# Altium PCB PCB1.PcbDoc (part 3 of 7)
Units mil, origin at the board's own origin, x right, y up, seen from the top; angles counter-clockwise.
Board outline 2100 x 2700 mil, 6 copper layers (Top Layer, Layer 2, Layer 3, Layer 4, Layer 5, Bottom Layer), stack 32.112 mil thick; 200 components, 319 nets, 1280 pads, 807 vias.
Unrouted connection lines stored in the file: 4.
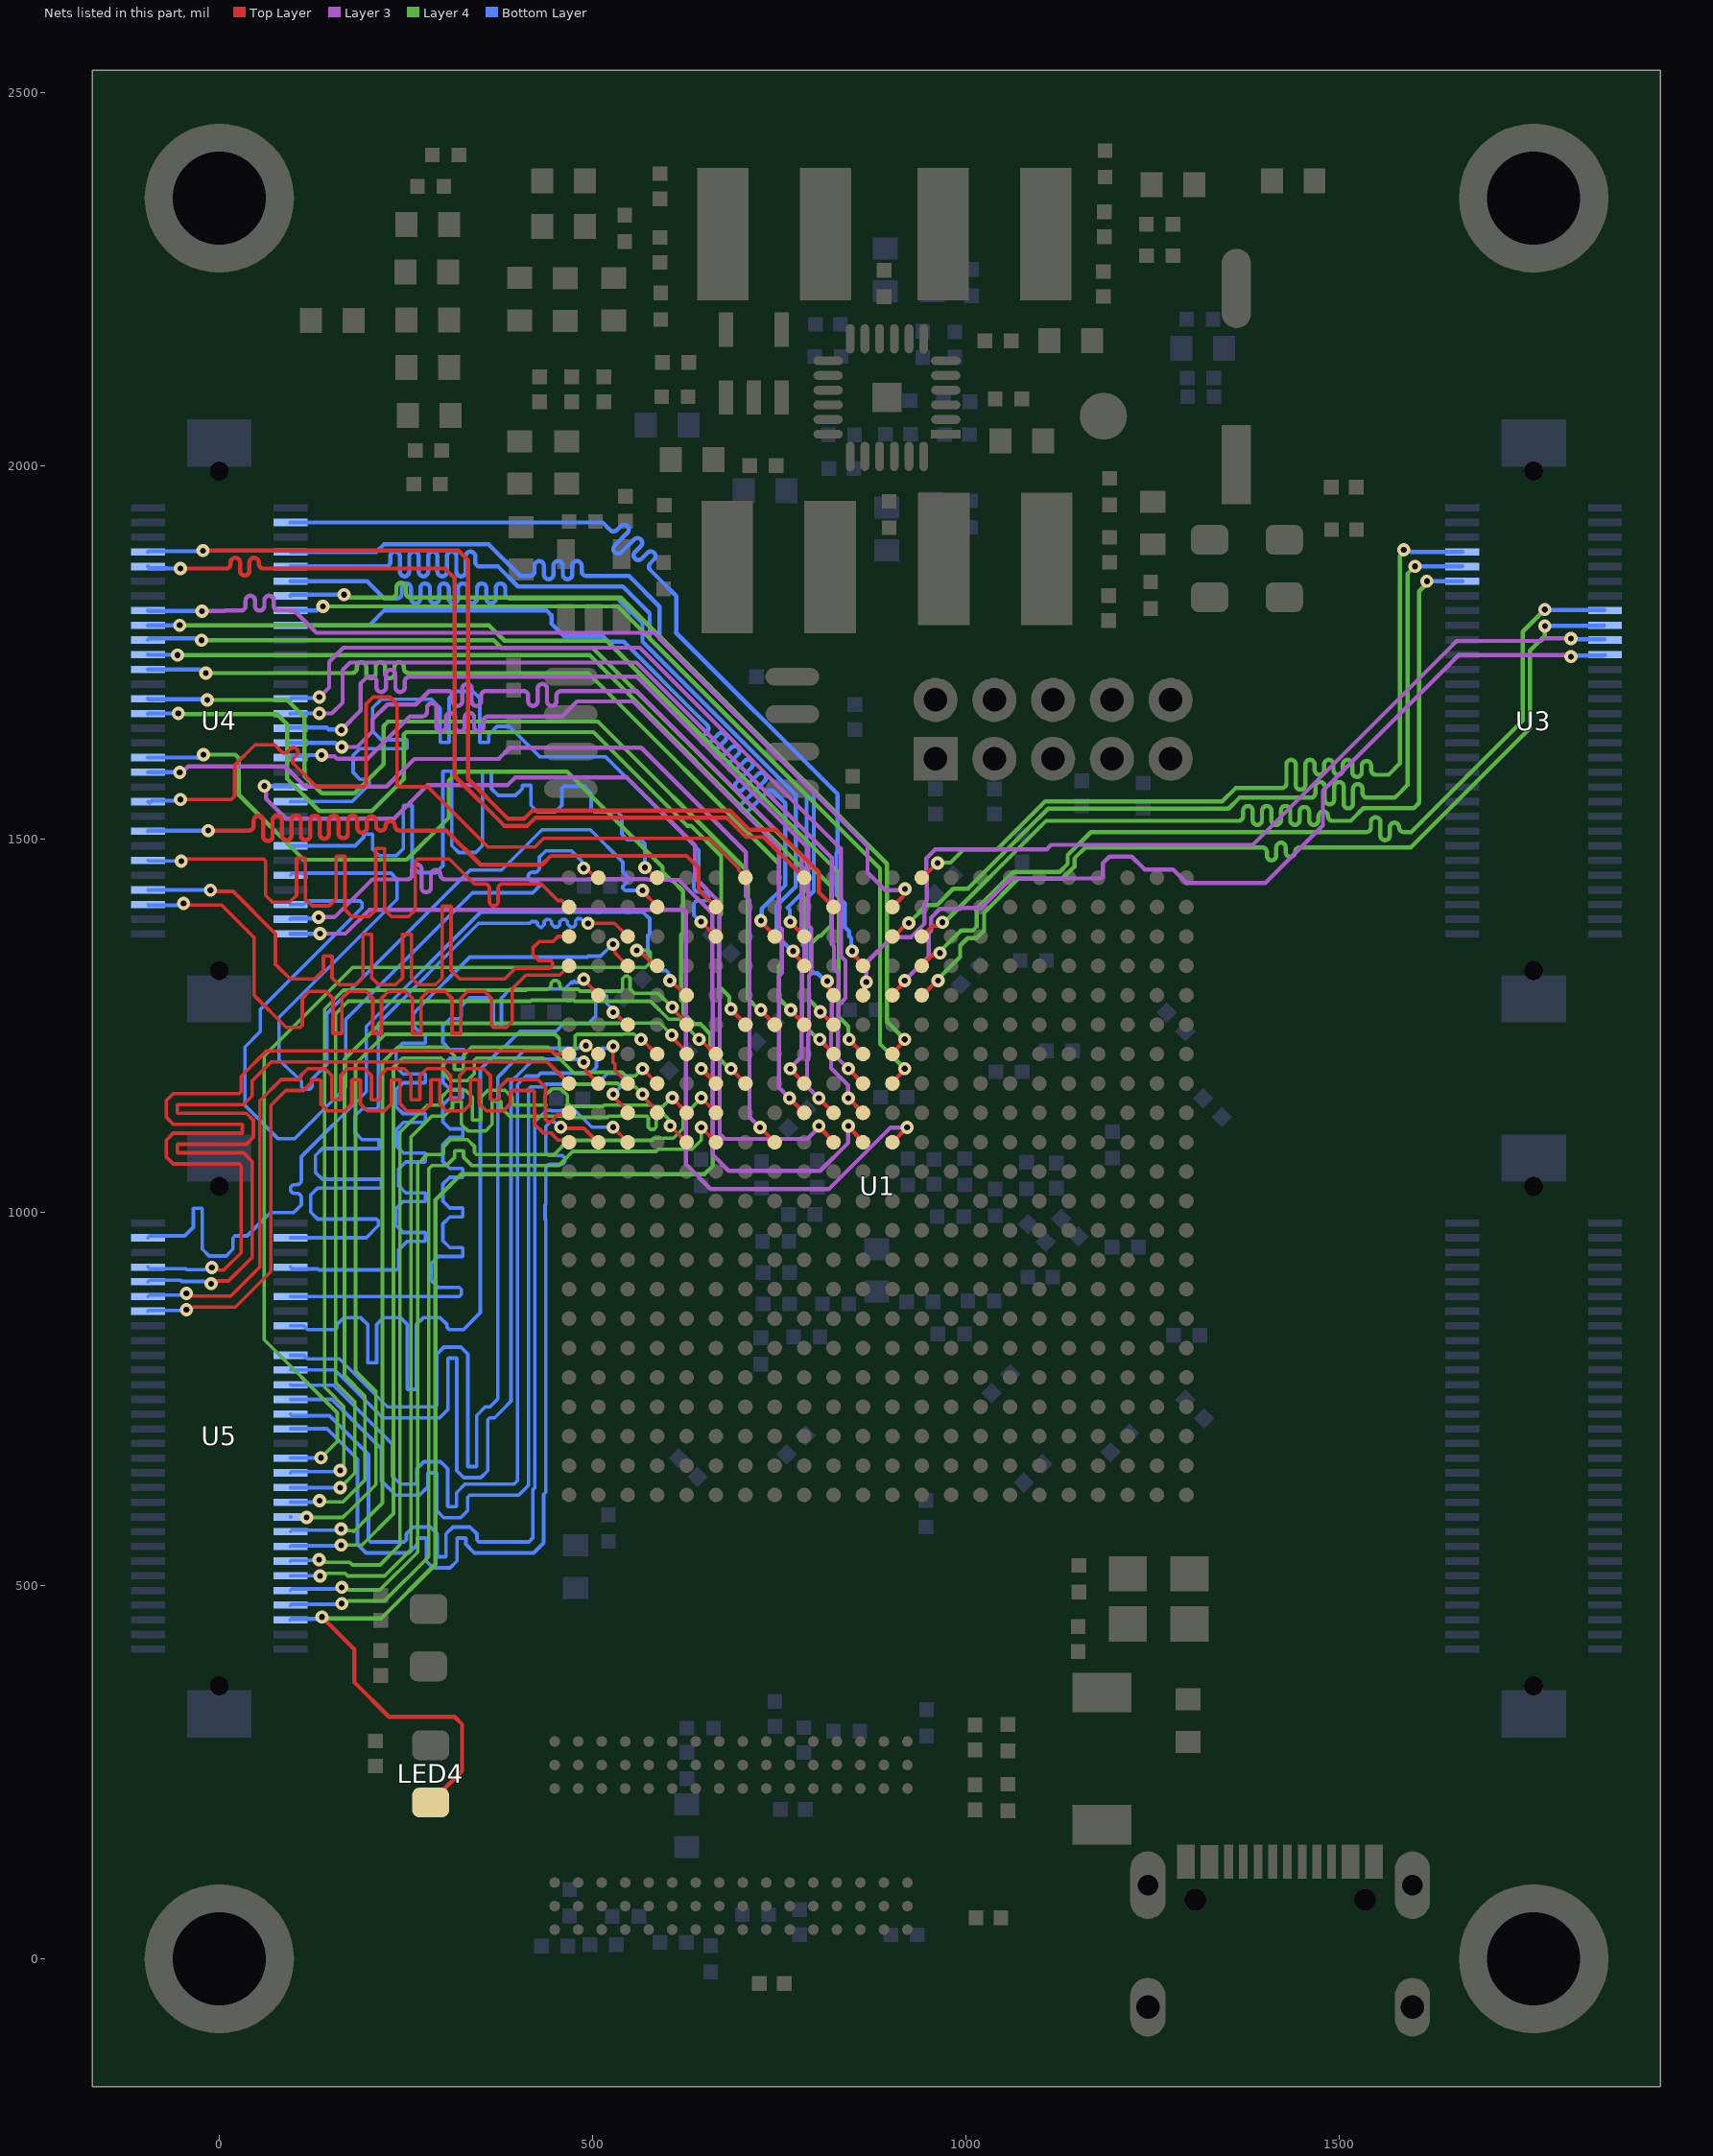
[diagram p7: the nets of this part, all layers, seen from the top]

## Via types
v1: diameter 17.7, hole 7.9, Top Layer to Bottom Layer, tented both sides, 807 vias

## Nets (pads, with @x,y where several pads share a name; then routed paths per layer and width w, separated by ;. In a path a pad name is that pad's centre, name@x,y a point inside that pad or via, vN(x,y) a via of type N, cw(c..) or ccw(c..) an arc to the next point about the centre after c; other vN are vias at no path point) (continued)
B15_N_L16: U1.L18 U3.42 | length 1263
  Top Layer w5.61: U1.L18@861.89,1290.48 864.11,1292.7 864.11,1305.89 v1(866.33,1308.11)
  Layer 3 w5.61: v1(866.33,1308.11) 866.33,1334.29 900.04,1368 926,1368 944,1386 944,1413.44 947.42,1416.86 947.42,1445.03 946.69,1445.76 946.69,1473.92 958.66,1485.89 1107.77,1485.89 1113.88,1492 1360,1492 1384,1492 1657,1765 1770.11,1765 1773.42,1768.32 v1(1810,1768.32)
  Bottom Layer w5.61: v1@1811.03,1767.29 U3.42@1854.44,1767.29
B15_N_L17: U1.N19 U3.46 | length 1269.2
  Top Layer w5.61: U1.N19@940.63,1329.85 955.45,1344.67 962.84,1344.67 v1(965.15,1346.99)
  Layer 4 w5.61: v1(965.15,1346.99) 965.15,1349.28 992.88,1377 1009,1377 1014,1382 1014,1406 1063.58,1455.58 1125.26,1455.58 1136,1466.32 1136,1478 1167,1509 1532.97,1509 1535.77,1509 ccw(c1535.77,1515.3) 1542.08,1515.3 1542.08,1522.7 cw(c1548.38,1522.7) 1554.69,1522.7 1554.69,1504.47 ccw(c1560.99,1504.47) 1567.3,1504.47 1567.3,1515.31 cw(c1573.6,1515.31) 1579.91,1515.31 ccw(c1586.21,1515.3) 1586.21,1509 1596,1509 1611.69,1524.69 1745.5,1658.5 1745.5,1777.5 v1(1775,1807)
  Bottom Layer w5.61: v1(1775,1807) 1775.69,1806.31 1854.47,1806.31 U3.46@1854.63,1806.47
B15_N_L18: U1.M20 U3.51 | length 1269.3
  Top Layer w5.61: U1.M20@901.26,1369.22 903.25,1369.22 921.16,1387.13 v1(923.15,1387.13)
  Layer 4 w5.61: v1(923.15,1387.13) 947.25,1411.22 961.01,1411.22 982.79,1433 1002.44,1433 1082.44,1513 1109.83,1540.39 1351.39,1540.39 1366,1555 1458.61,1555 1461.42,1555 ccw(c1461.42,1561.3) 1467.72,1561.3 1467.72,1569.88 cw(c1474.03,1569.88) 1480.33,1569.88 1480.33,1552.53 ccw(c1486.64,1552.53) 1492.94,1552.53 1492.94,1569.88 cw(c1499.25,1569.88) 1505.55,1569.88 1505.55,1547.06 ccw(c1511.86,1547.06) 1518.16,1547.06 1518.16,1566.96 cw(c1524.47,1566.96) 1530.77,1566.96 1530.77,1561.3 ccw(c1537.08,1561.3) 1537.08,1555 1574,1555 1576.61,1557.61 1591,1572 1591,1855 v1(1601,1865)
  Bottom Layer w5.61: v1@1601,1864.68 U3.51@1664.54,1864.68
B15_N_L19: U1.K14 U4.30 | length 1292.7
  Top Layer w5.61: v1(802.83,1152.69) U1.K14@822.52,1133
  Layer 3 w5.61: v1(163.45,1645.84) 189,1671.4 189,1708 191.91,1710.91 198,1717 204.17,1717 cw(c204.17,1710.7) 210.47,1710.7 210.47,1702.96 ccw(c216.78,1702.96) 223.09,1702.96 223.09,1720.09 cw(c229.39,1720.09) 235.69,1720.09 235.7,1702.96 ccw(c242,1702.96) 248.3,1702.96 248.3,1710.7 cw(c254.61,1710.7) 254.61,1717 271.82,1717 559,1717 788.84,1487.16 788.84,1383.82 792.7,1379.96 792.7,1319.71 789.61,1316.63 789.61,1238.48 788.84,1237.7 788.84,1204.55 787.01,1202.72 787.01,1168.51 v1(802.83,1152.69)
  Bottom Layer w5.61: U4.30@95.47,1648.15 96.53,1649.2 143.53,1649.2 146.33,1646.4 162.89,1646.4 v1(163.45,1645.84)
B15_N_L20: U1.L13 U4.4 | length 1266.3
  Top Layer w5.61: v1(842.2,1115.35) 842.2,1114.33 861.89,1094.65 U1.L13@861.89,1093.63
  Layer 3 w5.61: v1(133,1395) 154.06,1395 204.75,1445.69 249,1445.69 251.81,1445.69 ccw(c251.81,1451.99) 258.11,1451.99 258.11,1459.39 cw(c264.42,1459.39) 270.72,1459.39 270.72,1434.65 ccw(c277.03,1434.65) 283.33,1434.65 283.33,1452 cw(c289.64,1452) 295.94,1452 ccw(c302.25,1451.99) 302.25,1445.69 349,1445.69 405,1445.69 494.15,1445.69 494.61,1446.15 572.89,1446.15 574.04,1445 615,1445 660.31,1399.69 660.31,1368.99 660.05,1368.73 660.05,1283.38 661,1282.43 661,1076.4 682.1,1055.3 804.64,1055.3 842.2,1092.87 v1(842.2,1115.35)
  Bottom Layer w5.61: U4.4@95.47,1392.24 96.65,1393.42 131.42,1393.42 v1(133,1395)
B15_N_L21: U1.J17 U4.37 | length 1268.3
  Top Layer w5.61: v1(765.35,1270.8) 765.35,1269.85 783.15,1252.05 U1.J17@783.15,1251.11
  Layer 4 w5.61: v1@-18.45,1722 v1(-18,1722) 175,1722 177.81,1722 ccw(c177.81,1728.3) 184.11,1728.3 184.11,1730.09 cw(c190.42,1730.09) 196.72,1730.09 196.72,1721.27 ccw(c203.03,1721.27) 209.33,1721.27 209.33,1730.09 cw(c215.64,1730.09) 221.94,1730.09 221.94,1721.27 ccw(c228.25,1721.27) 234.55,1721.27 234.55,1730.09 cw(c240.86,1730.09) 247.16,1730.09 247.16,1728.3 ccw(c253.47,1728.3) 253.47,1722 286.51,1722 494,1722 749.42,1466.58 749.42,1382.63 753.28,1378.77 753.28,1333.71 749.42,1329.85 749.42,1285.95 764.57,1270.8 v1(765.35,1270.8)
  Bottom Layer w5.61: U4.37@-95.46,1726.89 -26.16,1726.89 -21.27,1722 v1(-18,1722)
B15_N_L22: U1.L15 U4.34 | length 1231.9
  Top Layer w5.61: v1(842.2,1192.06) U1.L15@861.89,1172.37
  Layer 3 w5.61: v1(134,1689.7) 147,1702.7 147,1737 166,1756 563,1756 832.12,1486.88 832.12,1343.26 838.53,1336.85 838.53,1286.57 829.03,1277.07 829.03,1251.39 828.26,1250.61 828.26,1206 v1(842.2,1192.06)
  Bottom Layer w5.61: U4.34@95.47,1687.52 96.56,1688.61 132.91,1688.61 v1(134,1689.7)
B15_N_L23: U1.K16 U4.39 | length 1265
  Top Layer w5.61: v1(803.99,1231.43) 803.99,1230.85 822.52,1212.32 U1.K16@822.52,1211.74
  Layer 4 w5.61: v1(-56,1746) 496,1746 781.42,1460.58 781.42,1357.99 783.59,1355.81 783.59,1328.34 780.51,1325.25 780.51,1252.77 801.85,1231.43 v1(803.99,1231.43)
  Bottom Layer w5.61: U4.39@-95.46,1746.57 -95.18,1746.29 -56.29,1746.29 v1(-56,1746)
B15_N_L24: U1.M16 U4.48 | length 1249.3
  Top Layer w5.61: U1.M16@901.26,1211.74 901.26,1213.29 917.85,1229.88 v1(917.85,1231.43)
  Layer 4 w5.61: v1(167,1827) 171,1823 228,1823 230.81,1823 ccw(c230.81,1829.3) 237.11,1829.3 237.11,1836.7 cw(c243.42,1836.7) 249.72,1836.7 249.72,1829.3 ccw(c256.03,1829.3) 256.03,1823 277,1823 537.56,1823 893.91,1466.65 893.91,1255.36 v1(917.85,1231.43)
  Bottom Layer w5.61: U4.48@95.47,1825.31 97.13,1826.97 v1(167,1827)
B15_P_L1: U1.H13 U4.23 | length 1299
  Top Layer w5.61: v1(724.09,1113.32) U1.H13@743.78,1093.63
  Layer 3 w5.61: v1(-53,1589) -49.73,1589 -41.73,1597 88,1597 115,1570 224,1570 261,1607 374,1607 389,1622 565,1622 705,1482 705,1423 710,1418 710,1127.41 v1(724.09,1113.32)
  Bottom Layer w5.61: U4.23@-95.46,1589.09 -95.42,1589.05 v1(-53,1589) v1(-53,1589)
B15_P_L2: U1.G15 U4.25 | length 1254.3
  Top Layer w5.61: v1(685.27,1192.06) 685.27,1191.79 704.41,1172.64 U1.G15@704.41,1172.37
  Layer 4 w5.61: v1(-21.14,1612.66) 21.34,1612.66 25.93,1608.07 25.93,1558.93 112.93,1471.93 250.93,1471.93 307,1528 307,1578 319,1590 465.69,1590 593.68,1462.02 593.68,1455.48 605.46,1443.69 607.1,1443.69 620.89,1429.9 620.89,1373.75 618.49,1371.36 618.49,1283.83 621.58,1280.74 621.58,1266.1 635.79,1251.89 644.39,1251.89 657.72,1238.56 657.72,1217.18 682.85,1192.06 v1(685.27,1192.06)
  Bottom Layer w5.61: U4.25@-95.46,1608.78 -30.47,1608.78 -30.01,1608.31 -28.75,1608.31 -24.41,1612.66 v1(-21.14,1612.66)
B15_P_L3: U1.J14 U4.26 | length 1278.6
  Top Layer w5.61: v1(763.46,1152.69) U1.J14@783.15,1133
  Layer 3 w5.61: v1(137,1612) 138.4,1610.6 154.26,1610.6 157.52,1607.34 198.6,1607.34 255.25,1664 269,1664 271.81,1664 ccw(c271.81,1670.3) 278.11,1670.3 278.11,1675.21 cw(c284.42,1675.21) 290.72,1675.21 290.72,1650.3 ccw(c297.03,1650.3) 303.33,1650.3 303.33,1662.39 cw(c309.64,1662.39) 315.94,1662.39 315.94,1650.3 ccw(c322.25,1650.3) 328.55,1650.3 328.55,1662.38 cw(c334.86,1662.38) 341.16,1662.38 341.16,1650.3 ccw(c347.47,1650.3) 353.77,1650.3 353.77,1657.7 cw(c360.08,1657.7) 360.08,1664 378,1664 459,1664 479,1684 554,1684 749.42,1488.58 749.42,1382.63 753.28,1378.77 753.28,1320.39 749.42,1316.53 749.42,1166.73 v1(763.46,1152.69)
  Bottom Layer w5.61: U4.26@95.47,1608.78 97.59,1610.89 118.63,1610.89 119.74,1612 v1(137,1612)
B15_P_L4: U1.G17 U4.31 | length 1253.7
  Top Layer w5.61: v1(685.27,1272.19) 685.27,1271.22 704.41,1252.08 U1.G17@704.41,1251.11
  Layer 4 w5.61: v1(-55,1668) -54,1667 77,1667 90.63,1653.37 90.63,1580.5 133.88,1537.25 204.25,1537.25 247,1580 247,1639.71 250.29,1643 501,1643 626.49,1517.51 631.49,1517.51 672.1,1476.9 672.1,1399.05 669.42,1396.36 669.42,1378.86 669.16,1378.6 669.16,1302.42 682.95,1288.63 682.95,1274.51 v1(685.27,1272.19)
  Bottom Layer w5.61: U4.31@-95.47,1667.83 -95.39,1667.92 -55.08,1667.92 v1(-55,1668)
B15_P_L5: U1.J15 U4.28 | length 1295
  Top Layer w5.61: v1(764.57,1192.06) 764.57,1191.5 783.15,1172.93 U1.J15@783.15,1172.37
  Layer 3 w5.61: v1(164,1623) 184.49,1623 205,1643.51 205,1660 225,1680 263,1680 281,1698 291,1698 306.42,1698 cw(c306.42,1691.7) 312.72,1691.7 312.72,1684.3 ccw(c319.03,1684.3) 325.33,1684.3 325.33,1701.09 cw(c331.64,1701.09) 337.94,1701.09 337.94,1684.3 ccw(c344.25,1684.3) 350.55,1684.3 350.55,1691.7 cw(c356.86,1691.7) 356.86,1698 407.3,1698 cw(c407.3,1691.7) 413.6,1691.7 413.6,1684.3 ccw(c419.91,1684.3) 426.21,1684.3 426.21,1701.09 cw(c432.52,1701.09) 438.82,1701.09 438.82,1684.3 ccw(c445.13,1684.3) 451.43,1684.3 451.43,1691.7 cw(c457.74,1691.7) 457.74,1698 478,1698 559,1698 779.73,1477.27 779.73,1363.58 783.45,1359.86 783.45,1355.95 783.59,1355.81 783.59,1323.49 780.51,1320.4 780.51,1243.09 779.73,1242.31 779.73,1208.32 764.57,1193.17 v1(764.57,1192.06)
  Bottom Layer w5.61: U4.28@95.47,1628.46 155.27,1628.46 160.73,1623 v1(164,1623)
B15_P_L6: U1.H17 U4.33 | length 1276.1
  Top Layer w5.61: v1(725.15,1270.8) 725.15,1270.27 743.78,1251.64 U1.H17@743.78,1251.11
  Layer 4 w5.61: v1(-16,1686) 91,1686 114,1663 114,1584 137,1561 181,1561 220,1600 220,1651 226,1657 507,1657 707.69,1456.31 707.69,1285.95 722.85,1270.8 v1(725.15,1270.8)
  Bottom Layer w5.61: U4.33@-95.46,1687.52 -94.71,1686.76 -16.76,1686.76 v1(-16,1686)
B15_P_L7: U1.J22 U4.51 | length 1269.9
  Top Layer w5.61: v1(-52,1862) 6,1862 8.81,1862 ccw(c8.81,1868.31) 15.11,1868.31 15.11,1870.09 cw(c21.42,1870.09) 27.72,1870.09 27.72,1858.91 ccw(c34.03,1858.91) 40.33,1858.91 40.33,1870.09 cw(c46.64,1870.09) 52.94,1870.09 52.94,1868.31 ccw(c59.25,1868.31) 59.25,1862 74.8,1862 302,1862 315,1849 315,1584 381.49,1517.51 412.44,1517.51 422.96,1528.03 680.06,1528.03 705.87,1502.22 728.89,1502.22 U1.J22@783.15,1447.96
  Bottom Layer w5.61: U4.51@-95.46,1864.68 -93.35,1862.57 -69.83,1862.57 -69.26,1862 v1(-52,1862)
B15_P_L8: U1.H20 U4.44 | length 1284.9
  Top Layer w5.61: v1(725.15,1390.43) 725.15,1389.14 743.78,1370.51 U1.H20@743.78,1369.22
  Bottom Layer w5.61: U4.44@95.47,1785.94 200.94,1785.94 221,1806 438,1806 444.81,1799.19 444.81,1788.16 461.98,1771 514,1771 521.09,1763.91 541.5,1763.91 642.42,1662.99 653.32,1652.09 cw(c648.86,1647.63) 653.32,1643.17 647.33,1637.18 ccw(c651.79,1632.72) 647.33,1628.26 ccw(c651.78,1632.72) 656.24,1628.26 668.05,1640.07 cw(c672.5,1635.61) 676.96,1640.07 cw(c672.5,1635.61) 676.96,1631.15 665.16,1619.35 ccw(c669.62,1614.89) 665.16,1610.43 ccw(c669.62,1614.89) 674.08,1610.43 685.88,1622.23 cw(c690.34,1617.77) 694.8,1622.23 cw(c690.34,1617.77) 694.8,1613.32 682.99,1601.51 ccw(c687.45,1597.06) 682.99,1592.6 ccw(c687.45,1597.06) 691.91,1592.6 703.71,1604.4 cw(c708.17,1599.94) 712.63,1604.4 cw(c708.17,1599.94) 712.63,1595.48 692.07,1574.92 ccw(c696.53,1570.46) 692.07,1566.01 ccw(c696.53,1570.46) 700.98,1566.01 721.55,1586.57 cw(c726,1582.11) 730.46,1586.57 cw(c726,1582.11) 730.46,1577.65 699.66,1546.85 ccw(c704.12,1542.39) 699.66,1537.93 ccw(c704.12,1542.39) 708.58,1537.93 733.57,1562.92 cw(c738.03,1558.47) 742.49,1562.92 758,1547.41 758,1438 726.29,1406.29 726.29,1391.56 v1(725.15,1390.43)
B15_P_L9: U1.K21 U4.53 | length 1312.3
  Top Layer w5.61: v1(-22,1886) 320,1886 333,1873 333,1580.31 386.19,1527.12 408.46,1527.12 418.98,1537.64 684.04,1537.64 709.68,1512 746,1512 802.83,1455.17 802.83,1428.28 U1.K21@822.52,1408.59
  Bottom Layer w5.61: U4.53@-95.46,1884.37 -94.65,1885.18 -22.82,1885.18 v1(-22,1886)
B15_P_L10: U1.M21 U4.45 | length 1269.2
  Top Layer w5.61: U1.M21@901.26,1408.59 901.26,1411.64 902.81,1413.19 905.86,1413.19 914.53,1421.86
  Layer 3 w5.61: v1(-23.22,1805) 7.41,1805 8.02,1805.61 26,1805.61 28.81,1805.61 ccw(c28.81,1811.91) 35.11,1811.91 35.11,1819.3 cw(c41.42,1819.3) 47.72,1819.3 47.72,1811.91 ccw(c54.03,1811.91) 60.33,1811.91 60.33,1819.3 cw(c66.64,1819.3) 72.94,1819.3 72.94,1811.91 ccw(c79.25,1811.91) 79.25,1805.61 91.36,1805.61 100.39,1805.61 130,1776 582,1776 868,1490 868,1455 891.67,1431.33 916.77,1431.33 v1(918.18,1432.73)
  Bottom Layer w5.61: U4.45@-95.46,1805.63 -95.15,1805.31 -23.53,1805.31 v1(-23.22,1805)
B15_P_L11: U1.J20 U4.52 | length 1296.8
  Top Layer w5.61: v1(764.57,1388.91) 764.57,1388.35 783.15,1369.78 U1.J20@783.15,1369.22
  Bottom Layer w5.61: U4.52@95.47,1864.68 220,1864.68 222.81,1864.68 ccw(c222.81,1870.99) 229.11,1870.99 229.11,1878.38 cw(c235.42,1878.38) 241.72,1878.38 241.72,1857.92 ccw(c248.03,1857.92) 254.33,1857.92 254.33,1878.38 cw(c260.64,1878.38) 266.94,1878.38 266.94,1857.92 ccw(c273.25,1857.92) 279.55,1857.92 279.55,1878.38 cw(c285.86,1878.38) 292.16,1878.38 292.16,1857.92 ccw(c298.47,1857.92) 304.77,1857.92 304.77,1878.38 cw(c311.08,1878.38) 317.38,1878.38 317.38,1857.92 ccw(c323.69,1857.92) 329.99,1857.92 329.99,1878.38 cw(c336.3,1878.38) 342.6,1878.38 342.6,1870.99 ccw(c348.91,1870.99) 348.91,1864.68 358.16,1864.68 373.32,1864.68 400,1838 540.22,1838 576.22,1802 576.22,1767.99 786.39,1557.82 786.39,1433.27 760.85,1407.73 763.95,1404.62 763.95,1389.53 v1(764.57,1388.91)
B15_P_L12: U1.J19 U4.50 | length 1306.4
  Top Layer w5.61: v1(768.44,1349.54) 768.44,1347.05 783.15,1332.34 U1.J19@783.15,1329.85
  Bottom Layer w5.61: U4.50@95.47,1845 198,1845 221,1822 235,1822 237.81,1822 ccw(c237.81,1828.3) 244.11,1828.3 244.11,1835.7 cw(c250.42,1835.7) 256.72,1835.7 256.72,1821.91 ccw(c263.03,1821.91) 269.33,1821.91 269.33,1835.7 cw(c275.64,1835.7) 281.94,1835.7 281.94,1821.91 ccw(c288.25,1821.91) 294.55,1821.91 294.55,1835.7 cw(c300.86,1835.7) 307.16,1835.7 307.16,1821.91 ccw(c313.47,1821.91) 319.77,1821.91 319.77,1835.7 cw(c326.08,1835.7) 332.38,1835.7 332.38,1821.91 ccw(c338.69,1821.91) 344.99,1821.91 344.99,1835.7 cw(c351.3,1835.7) 357.6,1835.7 357.6,1821.91 ccw(c363.91,1821.91) 370.21,1821.91 370.21,1835.7 cw(c376.52,1835.7) 382.82,1835.7 382.82,1828.3 ccw(c389.13,1828.3) 389.13,1822 414,1822 533.61,1822 566.61,1789 566.61,1764.01 772,1558.62 772,1436 746.19,1410.19 746.19,1366.81 751.76,1361.24 755.73,1361.24 767.43,1349.54 v1(768.44,1349.54)
B15_P_L13: U1.K18 U4.54 | length 1266.6
  Top Layer w5.61: v1(814.02,1309.35) 816.33,1307.04 816.33,1300.48 822.52,1294.29 U1.K18@822.52,1290.48
  Bottom Layer w5.61: U4.54@95.47,1884.37 210.37,1884.37 220.29,1894.29 360.71,1894.29 403,1852 413,1852 415.81,1852 ccw(c415.81,1858.31) 422.11,1858.31 422.11,1865.69 cw(c428.42,1865.69) 434.72,1865.69 434.72,1853.91 ccw(c441.03,1853.91) 447.33,1853.91 447.33,1865.69 cw(c453.64,1865.69) 459.94,1865.69 459.94,1853.91 ccw(c466.25,1853.91) 472.55,1853.91 472.55,1865.69 cw(c478.86,1865.69) 485.16,1865.69 485.16,1858.31 ccw(c491.47,1858.31) 491.47,1852 504.08,1852 548.61,1852 589.61,1811 589.61,1768.19 796,1561.8 796,1430 786.31,1420.3 786.31,1330.68 796.81,1320.18 800.77,1320.18 811.6,1309.35 v1(814.02,1309.35)
B15_P_L14: U1.L19 U4.58 | length 1286.3
  Top Layer w5.61: v1(847.28,1349.68) 847.28,1347.07 861.89,1332.46 U1.L19@861.89,1329.85
  Bottom Layer w5.61: U4.58@95.47,1923.74 513.26,1923.74 521.5,1915.5 523.48,1913.52 ccw(c527.94,1917.97) 532.4,1913.52 537.63,1918.74 cw(c542.08,1914.28) 546.54,1918.74 cw(c542.08,1914.28) 546.54,1909.83 529.45,1892.73 ccw(c533.91,1888.27) 529.45,1883.81 ccw(c533.91,1888.27) 538.37,1883.81 555.46,1900.91 cw(c559.92,1896.45) 564.38,1900.91 cw(c559.92,1896.45) 564.38,1891.99 556.56,1884.17 ccw(c561.01,1879.71) 556.56,1875.25 ccw(c561.01,1879.71) 565.47,1875.25 573.29,1883.08 cw(c577.75,1878.62) 582.21,1883.08 cw(c577.75,1878.62) 582.21,1874.16 576.98,1868.93 ccw(c581.44,1864.47) 576.98,1860.02 591,1846 612,1825 612,1777 611.38,1776.38 827.83,1559.93 827.83,1481.99 826.33,1480.49 826.33,1424.59 837.37,1413.55 837.37,1382.19 843.41,1376.15 843.41,1369.61 846.22,1366.8 846.22,1350.73 v1(847.28,1349.68)
B15_P_L15: U1.N22 U3.53 | length 1270.7
  Top Layer w5.61: U1.N22@940.63,1447.96 941.39,1447.96 961.08,1467.65 v1(961.85,1467.65)
  Layer 4 w5.61: v1(961.85,1467.65) 962.31,1468.11 979.11,1468.11 997,1486 1041.85,1486 1068.85,1513 1105.85,1550 1343,1550 1360.9,1567.9 1419.81,1567.9 1422.61,1567.9 ccw(c1422.61,1574.2) 1428.92,1574.2 1428.92,1599.49 cw(c1435.22,1599.49) 1441.53,1599.49 1441.53,1572.1 ccw(c1447.83,1572.1) 1454.14,1572.1 1454.14,1599.49 cw(c1460.44,1599.49) 1466.75,1599.49 1466.75,1592.1 ccw(c1473.05,1592.1) 1479.36,1592.1 1479.36,1599.49 cw(c1485.66,1599.49) 1491.97,1599.49 1491.97,1592.1 ccw(c1498.27,1592.1) 1504.58,1592.1 1504.58,1599.49 cw(c1510.88,1599.49) 1517.19,1599.49 1517.19,1589.18 ccw(c1523.49,1589.18) 1529.8,1589.18 1529.8,1597.99 cw(c1536.1,1597.99) 1542.41,1597.99 1542.41,1592.1 ccw(c1548.71,1592.1) 1548.71,1585.8 1565.8,1585.8 1581,1601 1581,1878.73 1586.07,1883.8 v1(1586.07,1887.07)
  Bottom Layer w5.61: v1(1586.07,1887.07) 1588.39,1884.76 1595.01,1884.76 1595.41,1884.37 U3.53@1664.54,1884.37
B15_P_L16: U1.M18 U3.40 | length 1241.6
  Top Layer w5.61: U1.M18@901.26,1290.48 901.26,1292.03 917.85,1308.62 v1(917.85,1310.17)
  Layer 3 w5.61: v1(917.85,1310.17) 950,1342.32 950,1374 953.11,1377.11 953.11,1394.27 964.84,1406 991.92,1406 993.23,1407.31 1020.31,1407.31 1059.89,1446.89 1179.97,1446.89 1183.25,1450.18 1183.25,1454.82 1183.21,1454.86 1183.21,1467.42 1192.09,1476.3 1221.7,1476.3 1239,1459 1277,1459 1295,1441 1389,1441 1401,1441 1477.81,1517.81 1477.81,1534.66 1477.81,1564.19 1659.62,1746 1808,1746 v1(1810,1744)
  Bottom Layer w5.61: v1(1810,1744) 1811.29,1745.29 1854.18,1745.29 U3.40@1855.34,1746.44
B15_P_L17: U1.N18 U3.44 | length 1268.6
  Top Layer w5.61: U1.N18@940.63,1290.48 941.65,1290.48 961.33,1310.17 v1(962.35,1310.17)
  Layer 4 w5.61: v1(962.35,1310.17) 962.35,1312.2 992.09,1341.94 992.09,1356.91 993,1357.82 993,1358 1002,1367 1014,1367 1024.11,1377.11 1024.11,1401.11 1069.47,1446.47 1129.04,1446.47 1145.11,1462.54 1145.11,1473.97 1159.65,1488.51 1360,1488.51 1381,1488.51 1396.42,1488.51 cw(c1396.42,1482.21) 1402.72,1482.21 1402.72,1477.43 ccw(c1409.03,1477.43) 1415.33,1477.43 1415.33,1488.51 cw(c1421.64,1488.51) 1427.94,1488.51 1427.94,1482.21 ccw(c1434.25,1482.21) 1440.55,1482.21 cw(c1446.86,1482.21) 1446.86,1488.51 1543,1488.51 1595.51,1488.51 1755.11,1648.11 1755.11,1752.11 1774.9,1771.9 1774.9,1784.76 v1(1775.07,1784.93)
  Bottom Layer w5.61: v1(1775.07,1784.93) 1775.61,1785.47 1853.63,1785.47 U3.44@1853.9,1785.74
B15_P_L18: U1.N20 U3.49 | length 1253
  Top Layer w5.61: U1.N20@940.63,1369.22 954.81,1383.4 v1@962.84,1383.4
  Layer 4 w5.61: v1(968.42,1388.15) 971.18,1388.15 1096.03,1513 1107.03,1524 1361.91,1524 1364.72,1524 ccw(c1364.72,1530.3) 1371.03,1530.3 1371.03,1537.69 cw(c1377.33,1537.69) 1383.64,1537.69 1383.64,1524.91 ccw(c1389.94,1524.91) 1396.25,1524.91 1396.25,1537.69 cw(c1402.55,1537.69) 1408.86,1537.69 1408.86,1524.91 ccw(c1415.16,1524.91) 1421.47,1524.91 1421.47,1537.69 cw(c1427.77,1537.69) 1434.08,1537.69 1434.08,1524.91 ccw(c1440.38,1524.91) 1446.69,1524.91 1446.69,1536.4 cw(c1452.99,1536.4) 1459.3,1536.4 1459.3,1524.91 ccw(c1465.6,1524.91) 1471.91,1524.91 1471.91,1530.31 cw(c1478.21,1530.31) 1484.52,1530.31 ccw(c1490.82,1530.3) 1490.82,1524 1515,1524 1516.91,1525.91 1532,1541 1599.71,1541 1606.75,1548.04 1606.75,1831.48 1617,1841.73 v1(1617,1845)
  Bottom Layer w5.61: v1(1617,1845) U3.49@1664.54,1845
B15_P_L19: U1.K13 U4.22 | length 1274
  Top Layer w5.61: v1(802.83,1115.35) 802.83,1114.33 822.52,1094.65 U1.K13@822.52,1093.63
  Layer 3 w5.61: v1(60.16,1570.57) 62.48,1568.26 62.48,1553.52 88.88,1527.12 234,1527.12 279,1572.12 386.12,1572.12 396,1582 546,1582 637,1491 637,1448 669.42,1415.58 669.42,1365.22 669.16,1364.96 669.16,1287.15 670.11,1286.21 670.11,1104.89 677,1098 787.52,1098 802.83,1113.32 v1(802.83,1115.35)
  Bottom Layer w5.61: v1(60.16,1570.57) 94.31,1570.57 U4.22@95.47,1569.41 U4.22@95.77,1569.7
B15_P_L20: U1.M13 U4.2 | length 1253.8
  Top Layer w5.61: U1.M13@901.26,1093.63 v1(920.95,1113.32)
  Layer 3 w5.61: v1(135,1373) 169,1373 201,1405 621.71,1405 625,1401.71 625,1064 658.31,1030.7 816.1,1030.7 898.72,1113.32 v1(920.95,1113.32)
  Bottom Layer w5.61: U4.2@95.47,1372.56 95.69,1372.78 134.78,1372.78 v1(135,1373)
B15_P_L21: U1.K17 U4.41 | length 1265.9
  Top Layer w5.61: v1(804.77,1268.15) 805.12,1268.15 822.16,1251.11 U1.K17@822.52,1251.11
  Layer 4 w5.61: v1(-24,1766) 367.41,1766 377.8,1755.61 499.98,1755.61 742.59,1513 819.15,1436.44 819.15,1383.82 805.15,1369.82 802.84,1369.82 792.7,1359.68 792.7,1319.71 789.61,1316.63 789.61,1284.81 804.77,1269.66 v1(804.77,1268.15)
  Bottom Layer w5.61: U4.41@-95.46,1766.26 -93.41,1768.31 -26.31,1768.31 v1(-24,1766)
B15_P_L22: U1.L14 U4.32 | length 1254
  Top Layer w5.61: v1(842.2,1152.69) U1.L14@861.89,1133
  Layer 3 w5.61: v1(134,1668) 150.76,1668 165,1682.24 165,1726 175,1736 558.71,1736 820,1474.71 820,1358.83 823.01,1355.81 823.01,1326.04 829.18,1319.87 829.18,1290.1 819.93,1280.85 819.93,1255.16 819.15,1254.39 819.15,1192.85 842.05,1169.95 842.05,1152.84 v1(842.2,1152.69)
  Bottom Layer w5.61: U4.32@95.47,1667.83 95.56,1667.92 133.92,1667.92 v1(134,1668)
B15_P_L23: U1.L16 U4.43 | length 1318.8
  Top Layer w5.61: v1(843.41,1231.43) 843.41,1230.82 861.89,1212.35 U1.L16@861.89,1211.74
  Layer 4 w5.61: v1(-53,1786) 361,1786 381.78,1765.22 518.78,1765.22 829.42,1454.58 829.42,1302.97 829.03,1302.59 829.03,1261.97 842.31,1248.69 842.31,1232.53 v1(843.41,1231.43)
  Bottom Layer w5.61: U4.43@-95.43,1785.97 v1(-53,1786)
B15_P_L24: U1.M15 U4.46 | length 1245.6
  Top Layer w5.61: U1.M15@901.26,1172.37 901.26,1173.97 917.85,1190.55 v1(917.85,1192.16)
  Layer 4 w5.61: v1(138.68,1811.31) 533.65,1811.34 884.8,1460.2 884.8,1225.1 917.75,1192.16 v1(917.85,1192.16)
  Bottom Layer w5.61: U4.46@95.47,1805.63 130.36,1805.63 136.04,1811.31 v1(138.68,1811.31)
B16_IO0: LED4.1 U1.F15 U5.6 | length 1666.9
  Top Layer w5.61: v1(137.36,457.79) 181,414.15 181,370 227,324 315,324 325,314 325,251.2 300.75,226.95 300.75,225.84 284.11,209.2 LED4.1@283,209.2 ; v1(645.35,1192.06) U1.F15@665.04,1172.37
  Layer 4 w5.61: v1(137.36,457.79) 137.36,456 217,456 289.5,528.5 289.5,1016.5 324,1051 650,1051 661,1062 661,1176.41 v1(645.35,1192.06)
  Bottom Layer w5.61: U5.6@95.47,453.93 96.51,454.96 135.96,454.96 137,456 137,457.44 v1(137.36,457.79)
B16_IO25: U1.F21 U4.15 | length 1174.4
  Top Layer w5.61: v1(-15,1511) 19,1511 37,1511 39.81,1511 ccw(c39.81,1517.3) 46.11,1517.3 46.11,1524.7 cw(c52.42,1524.7) 58.72,1524.7 58.72,1503.26 ccw(c65.03,1503.26) 71.33,1503.26 71.33,1524.7 cw(c77.64,1524.7) 83.94,1524.7 83.94,1504.48 ccw(c90.25,1504.48) 96.55,1504.48 96.55,1524.7 cw(c102.86,1524.7) 109.16,1524.7 109.16,1504.57 ccw(c115.47,1504.57) 121.77,1504.57 121.77,1524.7 cw(c128.08,1524.7) 134.38,1524.7 134.38,1506.3 ccw(c140.69,1506.3) 146.99,1506.3 146.99,1524.7 cw(c153.3,1524.7) 159.6,1524.7 159.6,1507.18 ccw(c165.91,1507.18) 172.21,1507.18 172.21,1524.7 cw(c178.52,1524.7) 184.82,1524.7 184.82,1514.56 ccw(c191.13,1514.56) 197.43,1514.56 197.43,1523.97 cw(c203.74,1523.97) 210.04,1523.97 210.04,1517.3 ccw(c216.35,1517.3) 222.65,1517.3 cw(c228.96,1517.31) 235.26,1517.31 ccw(c241.57,1517.3) 241.57,1511 299.63,1511 302.61,1511 304,1511 349.86,1465.14 432.01,1465.14 444.03,1477.16 625.7,1477.16 641.79,1461.06 641.79,1454.67 641.82,1431.81 U1.F21@665.04,1408.59
  Bottom Layer w5.61: U4.15@-95.47,1510.35 -95.14,1510.68 -15.32,1510.68 v1(-15,1511)
B16_N_L1: U1.F14 U5.10 | length 1195.1
  Top Layer w4.77: v1(645.35,1153.35) 645.35,1153.02 665.04,1133.33 U1.F14@665.04,1133
  Layer 4 w4.77: v1(164,497.47) 166.47,494.99 172.27,494.99 173.26,494 215,494 265.54,544.54 265.54,1064.43 278.11,1077 291,1077 297.71,1077 300.51,1079.79 300.51,1087.76 309.75,1097 332.58,1097 341.82,1087.76 341.82,1079.79 344.61,1077 399,1077 448.11,1077 467.11,1096 578.7,1096 581.7,1099 608,1099 621,1112 621,1128.33 645.35,1152.69 v1(645.35,1153.35)
  Bottom Layer w4.77: U5.10@95.47,493.3 97.55,495.38 161.92,495.38 v1(164,497.47)
B16_N_L2: U1.E17 U5.26 | length 1263.1
  Top Layer w4.77: v1(606.43,1274.46) 606.43,1272.41 625.67,1253.16 U1.E17@625.67,1251.11
  Layer 4 w4.77: v1(162,654) 162,657.5 166.78,662.28 166.78,739.88 145.33,761.33 141,765.66 141,1271.89 145.33,1276.21 162.03,1292.91 166.35,1297.24 410.51,1297.24 411.78,1298.51 435.84,1298.51 438.23,1298.51 ccw(c438.23,1304.39) 444.12,1304.39 cw(c450,1304.39) 455.89,1304.39 ccw(c461.77,1304.39) 461.77,1298.5 480.5,1298.51 483.01,1296 489.45,1296 537.21,1296 540,1298.79 540,1313 543.25,1316.25 547.21,1316.25 550,1313.46 550,1299 556.11,1292.89 588,1292.89 v1(606.43,1274.46)
  Bottom Layer w4.77: U5.26@95.47,650.78 97.08,652.39 160.39,652.39 v1(162,654)
B16_N_L3: U1.C15 U5.38 | length 1236
  Top Layer w4.77: v1(527.24,1221.99) 527.24,1200.74 529.72,1198.27 529.72,1189.58 543.97,1175.33 546.93,1175.33 U1.C15@546.93,1172.37
  Bottom Layer w4.77: U5.38@95.47,768.89 96.14,768.22 152.78,768.22 232,689 232,646 242.37,635.63 255,635.63 261.71,635.63 264.51,638.43 264.51,656.39 273.75,665.63 296.58,665.63 305.82,656.39 305.82,606.22 306.4,605.63 317,605.63 317.59,606.22 317.59,624.19 329.03,635.63 390.35,635.63 394.63,635.63 399.41,640.41 399.41,1170.93 410.86,1182.38 426.55,1182.38 430.18,1186.01 497.01,1186.01 505,1194 505,1212 512.51,1219.51 524.77,1219.51 v1(527.24,1221.99)
B16_N_L4: U1.E14 U5.14 | length 1258.9
  Top Layer w4.77: v1(606.35,1153.35) 606.35,1152.83 625.67,1133.52 U1.E14@625.67,1133
  Layer 4 w4.77: v1(133.58,534.42) 136.05,531.94 141.87,531.94 142.84,530.98 174.77,530.98 178.28,527.47 215.18,527.47 242,554.29 242,1106.89 278.35,1143.24 288,1143.24 294.71,1143.24 297.51,1146.03 297.51,1154 306.75,1163.24 329.58,1163.24 338.82,1154 338.82,1123.83 339.4,1123.24 350,1123.24 350.59,1123.83 350.59,1154 359.83,1163.24 382.66,1163.24 391.9,1154 391.9,1146.03 394.69,1143.24 405,1143.24 437.49,1143.24 436.55,1144.18 436.55,1156.39 445.18,1165.02 457.39,1165.02 466.02,1156.39 466.02,1144.18 465.08,1143.24 469.39,1143.24 470.86,1141.77 513.55,1141.77 515.02,1143.24 578.83,1143.24 580.56,1141.51 593.68,1141.51 605.52,1153.35 v1(606.35,1153.35)
  Bottom Layer w4.77: U5.14@95.47,532.67 96.35,533.54 132.7,533.54 v1(133.58,534.42)
B16_N_L5: U1.D16 U5.20 | length 1160
  Top Layer w4.77: v1(564.65,1231.43) 565.63,1231.43 585.32,1211.74 U1.D16@586.3,1211.74
  Layer 4 w4.77: v1(117,591) 165.11,591 171.34,597.23 171.85,597.23 209.69,635.07 209.69,760.12 182.41,787.39 182.41,1198.59 222.06,1238.23 449.77,1238.23 455,1233 455,1218 463.52,1209.48 467.48,1209.48 476.23,1218.23 476.23,1235.44 479.02,1238.23 539.46,1238.23 539.55,1238.32 555.39,1238.32 562.28,1231.43 v1(564.65,1231.43)
  Bottom Layer w4.77: U5.20@95.47,591.72 U5.20@95.61,591.86
B16_N_L6: U1.D15 U5.18 | length 1183.5
  Top Layer w4.77: v1(566.61,1192.06) U1.D15@586.3,1172.37
  Layer 4 w4.77: v1(163,575.7) 165.47,573.23 178.77,573.23 180,572 218.46,610.46 218.46,1140.07 218.46,1200.35 239.11,1221 264,1221 303.37,1221 314.82,1209.55 314.82,1191.59 315.4,1191 326,1191 326.59,1191.59 326.59,1209.55 338.03,1221 401,1221 440.01,1221 475,1186.01 493.98,1186.01 495.45,1187.48 539.46,1187.48 544.54,1182.4 556.96,1182.4 v1(566.61,1192.06)
  Bottom Layer w4.77: U5.18@95.47,572.04 97.3,573.87 161.17,573.87 v1(163,575.7)
B16_N_L7: U1.B16 U5.42 | length 1198.7
  Top Layer w4.77: v1(490.97,1223.03) 493.62,1223.03 504.9,1211.74 U1.B16@507.56,1211.74
  Bottom Layer w4.77: U5.42@95.47,808.26 113.19,808.26 118.1,803.34 160.91,803.34 192.92,771.33 225.08,739.17 282,739.17 288.71,739.17 291.51,741.97 291.51,809.93 300.75,819.17 323.58,819.17 332.82,809.93 332.82,659.76 333.4,659.17 344,659.17 344.59,659.76 344.59,727.73 356.03,739.17 362.17,739.17 373.08,750.08 373.08,821.56 373.08,1181.08 394.16,1202.16 394.16,1202.56 410.97,1219.38 480.85,1219.38 482.02,1220.55 488.49,1220.55 v1(490.97,1223.03)
B16_N_L8: U1.B13 U5.32 | length 1259.4
  Top Layer w4.77: v1(457.17,1113.74) 458.64,1112.26 488.4,1112.26 507.03,1093.63 U1.B13@507.56,1093.63
  Bottom Layer w4.77: U5.32@95.47,709.83 144.28,709.83 185,669.11 185,554.99 196.45,543.54 241,543.54 253.83,543.54 265.28,554.99 265.28,562.95 265.86,563.54 276.46,563.54 277.05,562.95 277.05,532.78 286.29,523.54 309.12,523.54 318.36,532.78 318.36,562.95 318.94,563.54 329.54,563.54 330.13,562.95 330.13,554.99 341.57,543.54 362.99,543.54 420.78,543.54 434.43,557.19 434.43,558 434.43,621.96 437.22,624.75 437.22,989.56 436.15,990.63 436.15,1009.4 437.22,1010.47 437.22,1044 437.22,1058.16 cw(c443.11,1058.16) 443.11,1064.04 456.89,1064.04 ccw(c456.89,1069.93) 456.89,1075.81 443.11,1075.81 cw(c443.11,1081.7) 437.22,1081.7 437.22,1098 437.22,1114.77 443.24,1120.78 448.64,1120.78 455.68,1113.74 v1(457.17,1113.74)
B16_N_L9: U1.A16 U5.53 | length 1207
  Top Layer w4.77: v1(-10,926) -7.53,923.53 -1.78,923.53 -0.74,922.49 6.01,922.49 29.08,945.57 29.08,1055 29.08,1061.71 26.29,1064.51 -61.67,1064.51 -70.92,1073.75 -70.92,1096.58 -61.67,1105.82 30.1,1105.82 30.69,1106.4 30.69,1117 30.1,1117.59 -61.67,1117.59 -70.92,1126.83 -70.92,1149.66 -61.67,1158.9 26.29,1158.9 29.08,1161.69 29.08,1173 29.08,1181.97 62.88,1215.77 405,1215.77 445.68,1215.77 449.71,1211.74 U1.A16@468.19,1211.74
  Bottom Layer w4.77: U5.53@-95.46,926.37 -93.45,924.36 -45.15,924.36 -43.73,922.93 -19.26,922.93 -18.67,923.53 -12.47,923.53 v1(-10,926)
B16_N_L10: U1.A14 U5.49 | length 1223
  Top Layer w4.77: v1(-44,891) -41.53,888.53 -35.73,888.53 -34.74,887.53 15.36,887.53 54.23,926.41 54.23,1149.12 82.88,1177.77 99.8,1177.77 106.51,1177.77 109.3,1180.56 109.3,1182.99 118.54,1192.23 141.37,1192.23 150.61,1182.99 150.61,1151.08 151.2,1150.49 161.79,1150.49 162.38,1151.08 162.38,1182.99 171.62,1192.23 194.45,1192.23 203.69,1182.99 203.69,1151.08 204.28,1150.49 214.87,1150.49 215.46,1151.08 215.46,1182.99 224.7,1192.23 247.53,1192.23 256.77,1182.99 256.77,1151.08 257.36,1150.49 267.95,1150.49 268.54,1151.08 268.54,1182.99 277.78,1192.23 300.61,1192.23 309.85,1182.99 309.85,1151.08 310.44,1150.49 321.03,1150.49 321.62,1151.08 321.62,1182.99 330.86,1192.23 353.69,1192.23 362.93,1182.99 362.93,1151.08 363.52,1150.49 374.11,1150.49 374.7,1151.08 374.7,1166.32 386.15,1177.77 404,1177.77 426.12,1177.77 436.85,1167.04 436.85,1156.69 436.55,1156.39 436.55,1144.18 436.85,1143.88 436.85,1123.79 439.64,1121 443.6,1121 452.75,1130.15 465.34,1130.15 U1.A14@468.19,1133
  Bottom Layer w4.77: U5.49@-95.46,887 -93.46,889 -46,889 v1(-44,891)
B16_N_L11: U1.B18 U5.50 | length 1218
  Top Layer w4.77: v1(487.87,1311.97) 487.87,1311.07 507.56,1291.38 U1.B18@507.56,1290.48
  Bottom Layer w4.77: U5.50@95.47,887 321.21,887 324,889.79 324,896.5 321.21,899.3 292.81,899.3 283.57,908.54 283.57,931.37 292.81,940.61 325.41,940.61 326,941.2 326,951.79 325.41,952.38 308.64,952.38 299.4,961.62 299.4,984.45 308.64,993.69 325.41,993.69 326,994.28 326,1004.87 325.41,1005.46 308.64,1005.46 299.4,1014.7 299.4,1037.53 308.64,1046.77 325.41,1046.77 326,1047.36 326,1057.95 325.41,1058.54 308.64,1058.54 299.4,1067.78 299.4,1090.61 308.64,1099.85 325.41,1099.85 326,1100.44 326,1111.03 325.41,1111.62 308.64,1111.62 299.4,1120.86 299.4,1143.69 308.64,1152.93 325.41,1152.93 326,1153.52 326,1164.11 325.41,1164.7 308.64,1164.7 299.4,1173.94 299.4,1196.77 308.64,1206.01 327.2,1206.01 327.79,1206.6 327.79,1217.19 327.2,1217.78 308.64,1217.78 299.4,1227.02 299.4,1249.85 308.64,1259.09 321.21,1259.09 324,1261.88 324,1268.64 324,1275.62 335.38,1287 360,1287 367,1280 367,1250.79 369.79,1248 374.83,1248 377.62,1250.79 377.62,1286.62 389.75,1298.75 462.25,1298.75 471.87,1308.37 473.26,1306.97 475.8,1309.5 478.08,1307.22 479.62,1307.22 484.37,1311.97 v1(487.87,1311.97)
B16_N_L12: U1.C17 U5.46 | length 1173.9
  Top Layer w4.77: v1(527.24,1267.74) 528.77,1267.74 545.4,1251.11 U1.C17@546.93,1251.11
  Bottom Layer w4.77: U5.46@95.47,847.63 113.19,847.63 118.1,842.71 148,842.71 154.71,842.71 157.51,845.51 157.51,849.3 166.75,858.54 189.58,858.54 198.82,849.3 198.82,798.73 199.4,798.14 210,798.14 210.59,798.73 210.59,849.3 219.83,858.54 242.66,858.54 251.9,849.3 251.9,763.3 252.48,762.71 263.08,762.71 263.67,763.3 263.67,849.3 272.91,858.54 295.74,858.54 304.98,849.3 304.98,845.51 307.77,842.71 324.18,842.71 326.82,842.71 349.54,865.43 349.54,1191.23 379.54,1221.23 381.63,1221.23 402.82,1242.42 405,1242.42 450.86,1242.42 460.97,1252.53 493.98,1252.53 504,1262.55 504,1286 508,1290 517.67,1290 518.79,1288.87 518.79,1279.68 527.24,1271.23 v1(527.24,1267.74)
B16_N_L13: U1.C19 U5.54 | length 1199.5
  Top Layer w4.77: v1(527.12,1358.74) 529.59,1356.26 529.59,1347.19 542.06,1334.72 543.05,1334.72 544.41,1336.08 544.41,1334.72 544.41,1329.85 U1.C19@546.93,1329.85
  Bottom Layer w4.77: U5.54@95.47,926.37 97.93,923.91 131.97,923.91 133.37,922.51 207.84,922.51 237.44,922.51 240.23,925.31 240.23,949.56 251.68,961.01 275.27,961.01 275.86,961.6 275.86,972.19 275.27,972.78 245.87,972.78 236.63,982.02 236.63,1004.85 245.87,1014.09 275.27,1014.09 275.86,1014.68 275.86,1025.27 275.27,1025.86 249.48,1025.86 240.24,1035.1 240.24,1057.93 249.48,1067.17 275.27,1067.17 275.86,1067.76 275.86,1078.35 275.27,1078.94 246.8,1078.94 237.56,1088.18 237.56,1111.01 246.8,1120.25 275.27,1120.25 275.86,1120.84 275.86,1131.43 275.27,1132.02 245.87,1132.02 236.63,1141.26 236.63,1164.09 245.87,1173.33 275.27,1173.33 275.86,1173.92 275.86,1184.51 275.27,1185.1 245.87,1185.1 236.63,1194.34 236.63,1217.17 245.87,1226.41 275.27,1226.41 275.86,1227 275.86,1237.59 275.27,1238.18 270.95,1238.18 259.5,1249.62 259.5,1265.81 266.22,1272.52 335.17,1341.48 405,1341.48 492.81,1341.48 494.07,1342.74 510.39,1342.74 526.39,1358.74 v1(527.12,1358.74)
B16_N_L14: U1.D19 U5.28 | length 1266.5
  Top Layer w4.77: v1(559.1,1350.66) 562.29,1350.66 583.1,1329.85 U1.D19@586.3,1329.85
  Layer 4 w4.77: v1(136,671) 158.01,693.01 158.01,731.11 60,829.12 60,1209.11 178.63,1327.75 570.75,1327.75 577.34,1334.34 577.34,1347.87 574.54,1350.66 v1(559.1,1350.66)
  Bottom Layer w4.77: U5.28@95.47,670.46 95.74,670.73 135.73,670.73 v1(136,671)
B16_N_L15: U1.E18 U5.57 | length 1202.7
  Top Layer w4.77: v1(603.34,1310.17) 604.66,1310.17 624.35,1290.48 U1.E18@625.67,1290.48
  Bottom Layer w4.77: U5.57@-95.46,965.74 -93.01,968.2 -59,968.2 -46.17,968.2 -34.72,979.64 -34.72,1004.67 -34.14,1005.25 -23.54,1005.25 -22.95,1004.67 -22.95,950.48 -13.71,941.24 9.12,941.24 18.36,950.48 18.36,965.4 21.15,968.2 37.2,968.2 61,992 68.5,999.5 99.5,999.5 109.73,1009.73 109.73,1016.79 109.73,1019.17 ccw(c103.85,1019.17) 103.85,1025.06 101.09,1025.06 cw(c101.09,1030.94) 101.09,1036.83 103.85,1036.83 ccw(c103.85,1042.71) 109.73,1042.71 109.73,1066 109.73,1074.27 196.77,1161.3 196.77,1248.77 349.49,1401.49 567.75,1401.49 576.23,1393.01 576.23,1372.99 573.83,1370.6 573.83,1340.88 591.12,1323.6 598.48,1323.6 601.28,1320.8 601.28,1312.23 v1(603.34,1310.17)
B16_N_L16: U1.A20 U4.7 | length 1218.9
  Top Layer w4.77: v1@-9.9,1433.37 v1(-12,1431.27) -10.4,1429.66 18.42,1429.66 75.23,1372.85 75.23,1331.88 94.88,1312.23 115,1312.23 127.83,1312.23 139.28,1323.68 139.28,1342.41 139.86,1342.99 150.46,1342.99 151.05,1342.41 151.05,1313.72 160.29,1304.48 183.12,1304.48 192.36,1313.72 192.36,1371.64 192.94,1372.23 203.54,1372.23 204.13,1371.64 204.13,1313.72 213.37,1304.48 236.2,1304.48 245.44,1313.72 245.44,1371.64 246.02,1372.23 256.62,1372.23 257.21,1371.64 257.21,1313.72 266.45,1304.48 289.28,1304.48 298.52,1313.72 298.52,1409.3 299.1,1409.88 309.7,1409.88 310.29,1409.3 310.29,1323.68 321.73,1312.23 382.12,1312.23 396.65,1326.76 442.76,1326.76 446.23,1330.23 446.23,1334.18 443.44,1336.98 427.98,1336.98 419.68,1345.27 419.68,1353.89 428.37,1362.57 447,1362.57 453.65,1369.22 U1.A20@468.19,1369.22
  Bottom Layer w4.77: U4.7@-95.47,1431.61 -95.3,1431.44 -12.17,1431.44 v1(-12,1431.27)
B16_N_L17: U1.A19 U4.5 | length 1227.9
  Top Layer w4.77: v1(-48,1413.7) -45.53,1411.23 3.18,1411.23 46.69,1367.71 46.69,1290.31 89.56,1247.44 101.52,1247.44 108.23,1247.44 111.03,1250.24 111.03,1286.47 120.27,1295.71 143.1,1295.71 152.34,1286.47 152.34,1239.9 152.93,1239.31 163.52,1239.31 164.11,1239.9 164.11,1286.47 173.35,1295.71 196.18,1295.71 205.42,1286.47 205.42,1239.9 206.01,1239.31 216.6,1239.31 217.19,1239.9 217.19,1286.47 226.43,1295.71 249.26,1295.71 258.5,1286.47 258.5,1239.9 259.09,1239.31 269.68,1239.31 270.27,1239.9 270.27,1286.47 279.51,1295.71 302.34,1295.71 311.58,1286.47 311.58,1239.9 312.17,1239.31 322.76,1239.31 323.35,1239.9 323.35,1286.47 332.59,1295.71 355.42,1295.71 364.66,1286.47 364.66,1250.24 367.45,1247.44 379.7,1247.44 384.56,1247.44 392.23,1255.12 392.23,1299.12 410.66,1317.55 455.89,1317.55 U1.A19@468.19,1329.85
  Bottom Layer w4.77: U4.5@-95.47,1411.93 -94.5,1410.96 -48.96,1410.96 -48.96,1412.74 v1(-48,1413.7)
B16_N_L18: U1.F20 U4.20 | length 1200.5
  Top Layer w4.77: v1(645.15,1388.91) 645.25,1388.91 664.94,1369.22 U1.F20@665.04,1369.22
  Bottom Layer w4.77: U4.20@95.47,1549.72 95.75,1550 178,1550 188,1560 200.83,1572.83 200.83,1576.78 198.04,1579.58 188.35,1579.58 179.1,1588.82 179.1,1611.64 188.35,1620.89 250.92,1620.89 251.51,1621.47 251.51,1632.07 250.92,1632.66 216.72,1632.66 205.27,1644.1 205.27,1666 205.27,1675.32 216.72,1686.77 245,1686.77 284.37,1686.77 295.82,1675.32 295.82,1629.57 296.4,1628.98 307,1628.98 307.59,1629.57 307.59,1688.39 316.83,1697.63 339.66,1697.63 348.9,1688.39 348.9,1629.57 349.48,1628.98 360.08,1628.98 360.67,1629.57 360.67,1639.14 372.11,1650.59 388.3,1650.59 424.56,1614.33 428.89,1610 474.5,1610 517,1610 642.21,1484.79 642.21,1451.59 635.49,1444.87 635.49,1437 635.49,1434.61 ccw(c641.37,1434.61) 641.37,1428.73 649.6,1428.73 cw(c649.6,1422.84) 649.6,1416.96 641.37,1416.96 ccw(c641.37,1411.07) 635.49,1411.07 635.49,1397.72 639.35,1393.87 644.31,1388.91 v1(645.15,1388.91)
B16_N_L19: U1.C20 U5.58 | length 1220.4
  Top Layer w4.77: v1(493.73,1386.76) 493.94,1386.96 529.19,1386.96 543.77,1372.37 546.93,1372.37 U1.C20@546.93,1369.22
  Bottom Layer w4.77: U5.58@95.47,965.74 196.74,965.74 212.35,981.35 213.09,982.09 213.09,988.06 210.29,990.86 131.54,990.86 122.3,1000.1 122.3,1022.93 131.54,1032.17 216.11,1032.17 216.7,1032.76 216.7,1043.35 216.11,1043.94 138.03,1043.94 128.79,1053.18 128.79,1076.01 138.03,1085.25 213.43,1085.25 214.02,1085.84 214.02,1096.43 213.43,1097.02 191.11,1097.02 181.87,1106.26 181.87,1129.09 191.11,1138.33 210.29,1138.33 213.09,1141.12 213.09,1150 213.09,1252.69 347.16,1386.76 415.76,1386.76 418.2,1389.2 424.26,1389.2 426,1387.46 426,1385 430,1381 431,1381 435,1385 435,1389 438,1392 442.21,1392 445,1389.21 445,1386 446,1385 446,1384.79 448.79,1382 453.21,1382 456,1384.79 456,1389 459,1392 463.21,1392 466,1389.21 466,1386 470.25,1381.75 474.21,1381.75 477,1384.54 477,1390.21 479.79,1393 483.99,1393 490.23,1386.76 v1(493.73,1386.76)
B16_N_L20: U1.B22 U4.6 | length 1201.2
  Top Layer w4.77: v1(487.87,1460.84) 491.27,1460.84 504.16,1447.96 U1.B22@507.56,1447.96
  Bottom Layer w4.77: U4.6@95.47,1411.93 113.19,1411.93 118.1,1416.84 188.12,1416.84 190.92,1414.05 190.92,1407.37 54.69,1271.14 54.69,1241.58 34.23,1221.12 34.23,1142.88 78.91,1098.21 100.38,1098.21 169.31,1167.13 169.31,1258.13 338.94,1427.76 419.76,1427.76 420.74,1428.74 428.59,1436.59 428.59,1437.72 ccw(c422.7,1437.72) 422.7,1443.6 419.48,1443.6 cw(c419.48,1449.49) 419.48,1455.37 422.7,1455.37 ccw(c422.7,1461.26) 428.59,1461.26 428.59,1475.41 437.18,1484 471.52,1484 485.4,1470.12 485.4,1463.32 v1(487.87,1460.84)
B16_N_L21: U1.A21 U4.11 | length 1180.8
  Top Layer w4.77: v1(-51,1470) -48,1473 26,1473 59.25,1473 62.05,1470.21 62.05,1424.24 71.29,1415 94.12,1415 103.36,1424.24 103.36,1473.71 103.94,1474.3 114.54,1474.3 115.13,1473.71 115.13,1419.48 124.37,1410.24 147.2,1410.24 156.44,1419.48 156.44,1476.32 157.02,1476.91 167.62,1476.91 168.21,1476.32 168.21,1405.01 177.45,1395.77 200.28,1395.77 209.52,1405.01 209.52,1486.45 210.1,1487.04 220.7,1487.04 221.29,1486.45 221.29,1405.01 230.53,1395.77 253.36,1395.77 262.6,1405.01 262.6,1470.21 265.39,1473 280.14,1473 308.12,1473 341.58,1439.54 355.73,1439.54 cw(c355.73,1433.66) 361.62,1433.66 361.62,1416.1 ccw(c367.5,1416.1) 373.39,1416.1 373.39,1433.66 cw(c379.27,1433.66) 379.27,1439.54 401,1439.54 431.04,1439.54 453.12,1417.46 457.94,1417.46 466.81,1408.59 U1.A21@468.19,1408.59
  Bottom Layer w4.77: U4.11@-95.47,1470.98 -94.98,1470.49 -51.49,1470.49 v1(-51,1470)
B16_N_L22: U1.D22 U4.14 | length 1193.3
  Top Layer w4.77: v1(569.87,1461.31) 571.41,1461.31 584.76,1447.96 U1.D22@586.3,1447.96
  Bottom Layer w4.77: U4.14@95.47,1490.67 181.83,1490.67 193.28,1502.11 193.28,1505.91 193.86,1506.5 204.46,1506.5 205.05,1505.91 205.05,1486.78 214.29,1477.54 237.12,1477.54 246.36,1486.78 246.36,1543.94 246.94,1544.53 257.54,1544.53 258.13,1543.94 258.13,1463.91 267.37,1454.66 290.2,1454.66 299.44,1463.91 299.44,1590.08 300.02,1590.67 310.62,1590.67 311.21,1590.08 311.21,1491.01 320.45,1481.77 343.28,1481.77 352.52,1491.01 352.52,1590.08 353.1,1590.67 363.7,1590.67 364.29,1590.08 364.29,1567.25 373.53,1558.01 396.36,1558.01 405.6,1567.25 405.6,1571.1 406.18,1571.69 416.78,1571.69 417.37,1571.1 417.37,1545 426.61,1535.76 449.44,1535.76 458.68,1545 458.68,1567.44 461.47,1570.23 489.77,1570.23 489.77,1569.23 498,1561 498,1540 502,1536 533,1536 539,1530 539,1506 546,1499 564,1499 569.87,1493.13 v1(569.87,1461.31)
B16_N_L23: U1.D21 U4.10 | length 1242
  Top Layer w4.77: v1(566.61,1431) 566.61,1429.64 586.3,1409.95 U1.D21@586.3,1408.59
  Bottom Layer w4.77: U4.10@95.47,1451.3 98.01,1453.83 118.35,1453.83 118.52,1454 230,1454 238,1446 238,1418.89 80,1260.89 80,1204.21 97.88,1186.33 98.67,1186.33 110,1175 110,1167.79 112.79,1165 121.21,1165 124,1167.79 124,1178 143.77,1197.77 143.77,1265.88 154.44,1276.56 336.12,1458.23 378.12,1458.23 432.11,1512.22 496.96,1512.22 540.36,1468.82 540.36,1455.64 548,1448 548,1444 540.36,1436.36 540.36,1433.79 543.16,1431 v1(566.61,1431)
B16_N_L24: U1.G22 U4.19 | length 1192.7
  Top Layer w4.77: v1(-51.95,1552.63) 15.96,1552.63 20.56,1557.23 20.56,1598.44 47.88,1625.77 74.12,1625.77 81.44,1618.44 83.13,1616.76 ccw(c87.29,1620.92) 91.45,1616.76 95.3,1620.6 cw(c99.46,1616.44) 103.62,1620.6 cw(c99.46,1616.44) 103.62,1612.28 99.78,1608.43 ccw(c103.94,1604.27) 99.78,1600.11 128.79,1571.09 130.12,1569.77 187,1569.77 193.71,1569.77 196.51,1572.56 196.51,1680.53 205.75,1689.77 228.58,1689.77 237.82,1680.53 237.82,1572.56 240.61,1569.77 258,1569.77 279.11,1569.77 359.78,1489.1 422.8,1489.1 434.31,1500.62 655.51,1500.62 695.54,1460.59 695.54,1458.21 704.41,1449.34 U1.G22@704.41,1447.96
  Bottom Layer w4.77: U4.19@-95.47,1549.72 -93.61,1547.86 -90.49,1550.98 -53.6,1550.98 v1(-51.95,1552.63)
B16_P_L1: U1.F13 U5.8 | length 1183.1
  Top Layer w4.77: v1(645.35,1113.32) U1.F13@665.04,1093.63
  Layer 4 w4.77: v1(164,475.76) 166.47,478.24 172.27,478.24 173.26,479.23 221.11,479.23 280.31,538.43 280.31,1058.31 284.23,1062.23 291,1062.23 303.83,1062.23 315.28,1073.68 315.28,1081.64 315.86,1082.23 326.46,1082.23 327.05,1081.64 327.05,1073.68 338.49,1062.23 399,1062.23 454.23,1062.23 458.56,1066.56 473.23,1081.23 584.81,1081.23 587.81,1084.23 633.23,1084.23 645.35,1096.35 v1(645.35,1113.32)
  Bottom Layer w4.77: U5.8@95.47,473.61 96.55,474.69 162.92,474.69 v1(164,475.76)
B16_P_L2: U1.F16 U5.24 | length 1266.8
  Top Layer w4.77: v1(642.57,1231.43) 643.96,1231.43 663.65,1211.74 U1.F16@665.04,1211.74
  Layer 4 w4.77: v1(162,630.93) 181.55,650.48 181.55,746 155.77,771.78 155.77,1265.77 172.47,1282.47 405,1282.47 416.63,1282.47 417.9,1283.74 474.39,1283.74 475.65,1282.47 537.88,1282.47 537.97,1282.56 577.44,1282.56 601.77,1258.23 615.76,1258.23 v1(642.57,1231.43)
  Bottom Layer w4.77: U5.24@95.47,631.09 95.55,631.01 161.92,631.01 v1(162,630.93)
B16_P_L3: U1.C14 U5.36 | length 1239.5
  Top Layer w4.77: v1(527.24,1157.97) 527.24,1155.33 546.93,1135.64 U1.C14@546.93,1133
  Bottom Layer w4.77: U5.36@95.47,749.2 150.91,749.2 217.23,682.88 217.23,639.88 236.25,620.86 255,620.86 267.83,620.86 279.28,632.31 279.28,650.27 279.86,650.86 290.46,650.86 291.05,650.27 291.05,600.1 300.29,590.86 323.12,590.86 332.36,600.1 332.36,618.07 335.15,620.86 390.35,620.86 400.75,620.86 414.18,634.3 414.18,1164.82 416.98,1167.61 432.85,1167.61 436.48,1171.24 505.24,1171.24 520,1186 540.21,1186 543,1183.21 543,1173.73 528.98,1159.71 528.98,1157.97 v1(527.24,1157.97) v1@525.65,1157.97
B16_P_L4: U1.E13 U5.12 | length 1258.9
  Top Layer w4.77: v1(603.73,1115.57) U1.E13@625.67,1093.63
  Layer 4 w4.77: v1(135,512.76) 137.47,515.24 143.29,515.24 144.26,516.21 168.65,516.21 172.16,512.7 221.29,512.7 256.77,548.18 256.77,1100.77 284.47,1128.47 288,1128.47 300.83,1128.47 312.28,1139.92 312.28,1147.88 312.86,1148.47 323.46,1148.47 324.05,1147.88 324.05,1117.71 333.29,1108.47 356.12,1108.47 365.36,1117.71 365.36,1147.88 365.94,1148.47 376.54,1148.47 377.13,1147.88 377.13,1139.92 388.57,1128.47 405,1128.47 463.28,1128.47 464.75,1127 519.67,1127 521.14,1128.47 572.72,1128.47 574.44,1126.74 574.44,1113.79 577.24,1111 582.21,1111 585,1113.79 585,1127 589,1131 595,1131 601.26,1124.74 601.26,1118.04 v1(603.73,1115.57) v1@603.73,1116.7
  Bottom Layer w4.77: U5.12@95.47,512.98 95.58,512.87 134.89,512.87 v1(135,512.76)
B16_P_L5: U1.E16 U5.22 | length 1188.5
  Top Layer w4.77: v1(605.98,1237.12) 605.98,1234.27 625.67,1214.59 U1.E16@625.67,1211.74
  Layer 4 w4.77: v1(134.37,613.7) 134.37,612 165.73,612 194.92,641.19 194.92,754 167.64,781.28 167.64,1204.7 215.94,1253 533.35,1253 533.43,1253.09 590.02,1253.09 v1(605.98,1237.12)
  Bottom Layer w4.77: U5.22@95.47,611.41 95.77,611.7 134.05,611.7 134.35,612 v1@134.35,613.67
B16_P_L6: U1.D14 U5.16 | length 1192.5
  Top Layer w4.77: v1(566.61,1157.97) 566.61,1155.33 586.3,1135.64 U1.D14@586.3,1133
  Layer 4 w4.77: v1(163,554) 191,554 233.23,596.23 233.23,1133.96 233.23,1194.23 245.23,1206.23 264,1206.23 297.25,1206.23 300.05,1203.44 300.05,1185.47 309.29,1176.23 332.12,1176.23 341.36,1185.47 341.36,1203.44 344.15,1206.23 401,1206.23 433.89,1206.23 468.88,1171.24 500.09,1171.24 501.56,1172.71 533.35,1172.71 538.43,1167.63 556.96,1167.63 v1(566.61,1157.97)
  Bottom Layer w4.77: U5.16@95.47,552.35 96.29,553.18 162.18,553.18 v1(163,554)
B16_P_L7: U1.B15 U5.40 | length 1206.8
  Top Layer w4.77: v1(487.87,1200.74) 490.35,1198.27 490.35,1189.58 U1.B15@507.56,1172.37
  Bottom Layer w4.77: U5.40@95.47,788.57 154.8,788.57 186.8,756.56 218.97,724.4 278.95,724.4 282,724.4 294.83,724.4 306.28,735.85 306.28,803.81 306.86,804.4 317.46,804.4 318.05,803.81 318.05,653.64 327.29,644.4 350.12,644.4 359.36,653.64 359.36,721.61 362.15,724.4 368.29,724.4 378.07,734.18 390.64,746.76 390.64,1174.57 405,1188.92 420.68,1204.61 480.51,1204.61 484.37,1200.74 v1(487.87,1200.74)
B16_P_L8: U1.C13 U5.34 | length 1266.5
  Top Layer w4.77: v1(527.24,1113.74) 527.24,1113.53 546.93,1093.84 U1.C13@546.93,1093.63
  Bottom Layer w4.77: U5.34@95.47,729.52 97.76,727.23 147.77,727.23 199.77,675.23 199.77,561.11 202.56,558.31 241,558.31 247.71,558.31 250.51,561.11 250.51,569.07 259.75,578.31 282.58,578.31 291.82,569.07 291.82,538.9 292.4,538.31 303,538.31 303.59,538.9 303.59,569.07 312.83,578.31 335.66,578.31 344.9,569.07 344.9,561.11 347.69,558.31 362.99,558.31 414.66,558.31 419.66,563.31 419.66,628.08 422.45,630.87 422.45,1120.88 437.84,1136.27 444.46,1136.27 445.18,1135.55 457.39,1135.55 458.11,1136.27 476.38,1136.27 498.92,1113.74 v1(527.24,1113.74)
B16_P_L9: U1.A15 U5.51 | length 1217.2
  Top Layer w4.77: v1(-10.91,904.21) -8.43,906.68 -2.68,906.68 -1.65,907.72 12.12,907.72 35.2,930.8 43.85,939.45 43.85,1055 43.85,1067.83 32.41,1079.28 -55.56,1079.28 -56.15,1079.86 -56.15,1090.46 -55.56,1091.05 36.22,1091.05 45.46,1100.29 45.46,1123.12 36.22,1132.36 -55.56,1132.36 -56.15,1132.94 -56.15,1143.54 -55.56,1144.13 32.41,1144.13 43.85,1155.57 43.85,1173 43.85,1175.85 69,1201 405,1201 439.56,1201 U1.A15@468.19,1172.37
  Bottom Layer w4.77: U5.51@-95.46,906.68 -93.45,908.69 -51.64,908.69 -50.21,907.27 -20.17,907.27 -19.57,906.68 -13.38,906.68 v1(-10.91,904.21)
B16_P_L10: U1.A13 U5.47 | length 1222.1
  Top Layer w4.77: v1(-44,869.3) -41.53,871.77 -35.73,871.77 -34.74,872.76 21.47,872.76 69,920.29 69,1143 89,1163 99.8,1163 112.63,1163 124.07,1174.45 124.07,1176.87 124.66,1177.46 135.25,1177.46 135.84,1176.87 135.84,1144.96 145.08,1135.72 167.91,1135.72 177.15,1144.96 177.15,1176.87 177.74,1177.46 188.33,1177.46 188.92,1176.87 188.92,1144.96 198.16,1135.72 220.99,1135.72 230.23,1144.96 230.23,1176.87 230.82,1177.46 241.41,1177.46 242,1176.87 242,1144.96 251.24,1135.72 274.07,1135.72 283.31,1144.96 283.31,1176.87 283.9,1177.46 294.49,1177.46 295.08,1176.87 295.08,1144.96 304.32,1135.72 327.15,1135.72 336.39,1144.96 336.39,1176.87 336.98,1177.46 347.57,1177.46 348.16,1176.87 348.16,1144.96 357.4,1135.72 380.23,1135.72 389.47,1144.96 389.47,1160.21 392.27,1163 404,1163 420,1163 421.78,1161.22 421.78,1138.06 422.08,1137.76 422.08,1117.67 433.53,1106.23 443.84,1106.23 453.59,1096.48 465.34,1096.48 U1.A13@468.19,1093.63
  Bottom Layer w4.77: U5.47@-95.46,867.31 -94.47,868.31 -44.99,868.31 v1(-44,869.3)